# Altium PCB Kick_PCB.PcbDoc
Units mm, origin at the board's own origin, x right, y up, seen from the top; angles counter-clockwise.
Board outline 90 x 34 mm, 2 copper layers (Top Layer, Bottom Layer); 55 components, 43 nets, 172 pads, 27 vias.
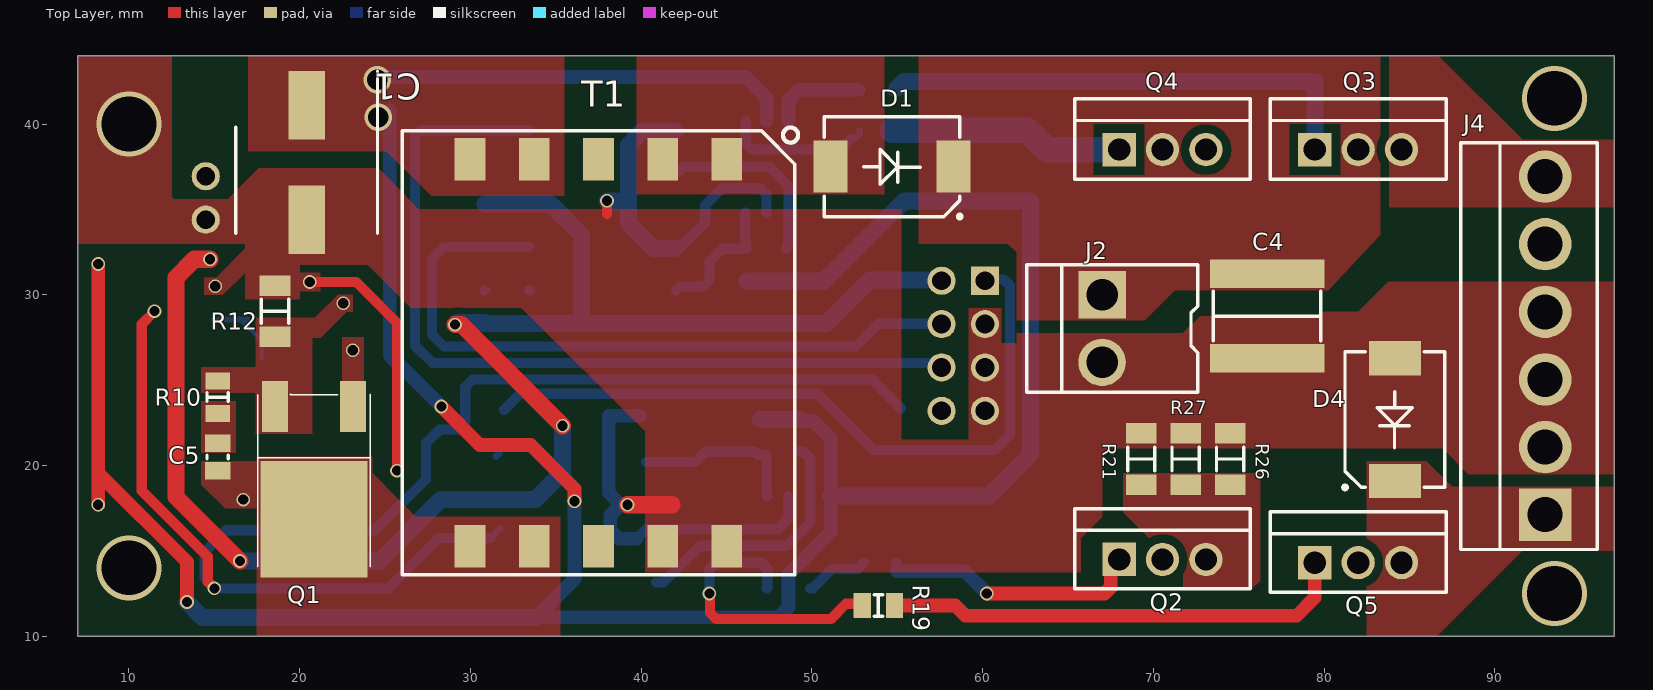
[diagram p0: Top Layer view]
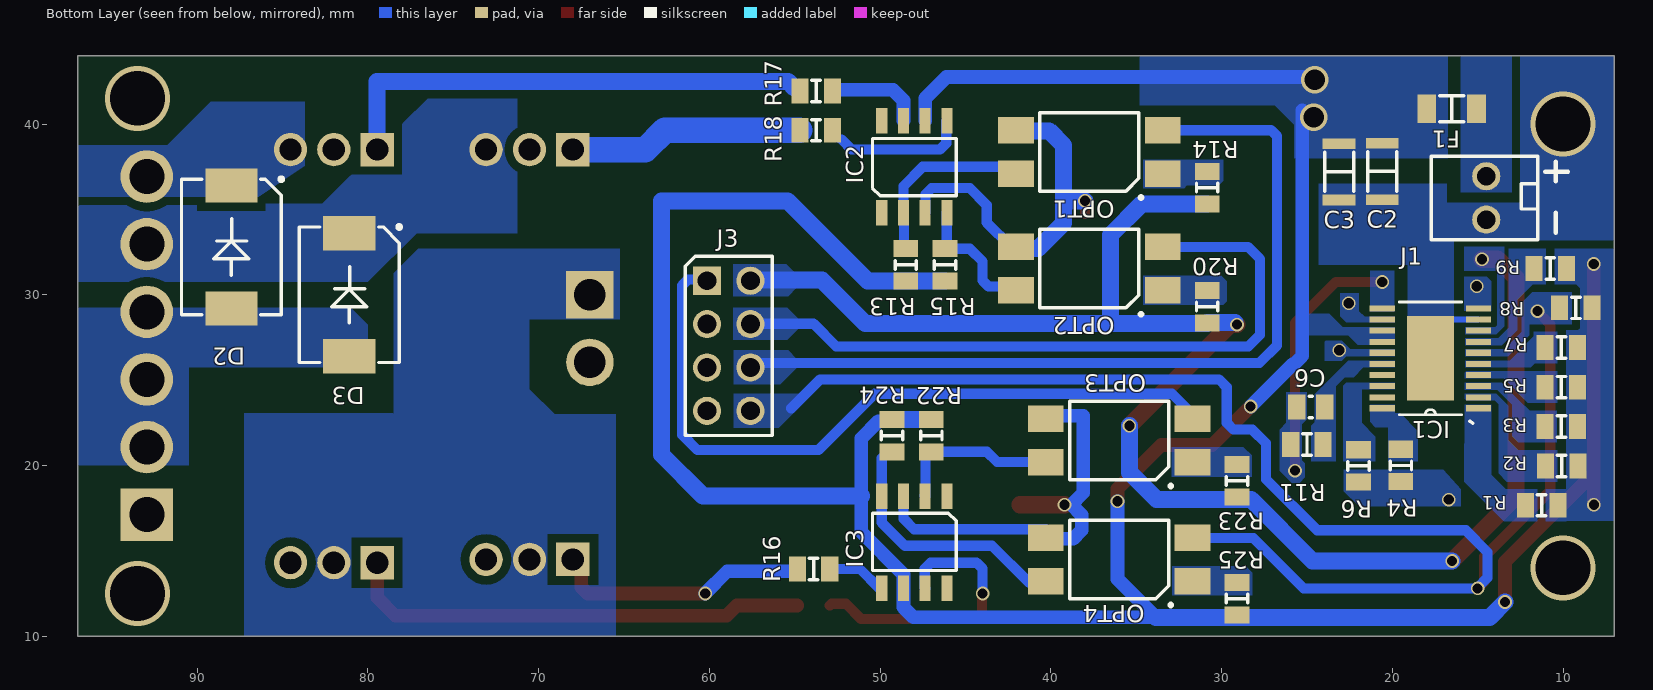
[diagram p1: Bottom Layer view, seen from below]
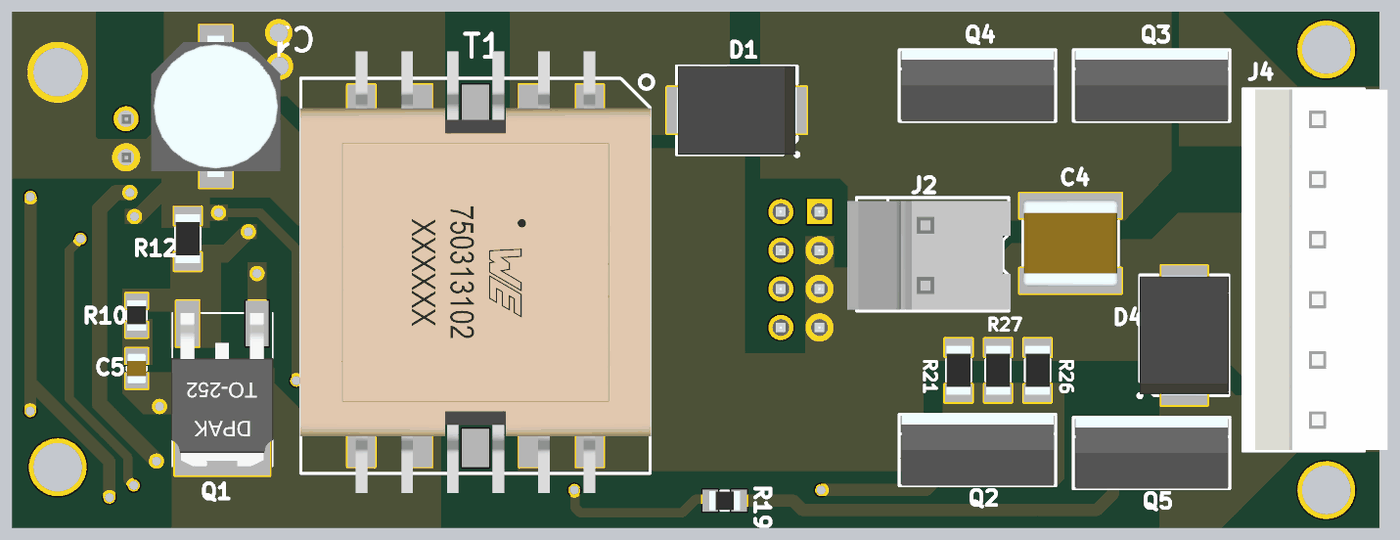
[diagram p2: 3D render of the assembled board from above, using the file's embedded part models]
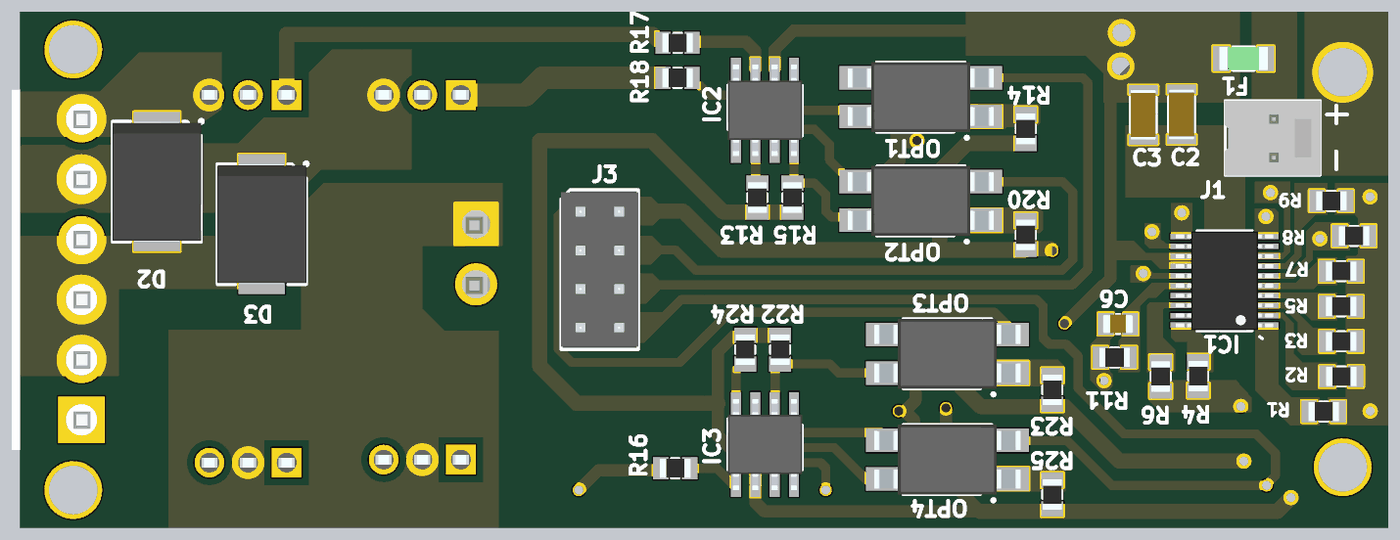
[diagram p3: 3D render of the assembled board from below, using the file's embedded part models]

## Layer stack, top to bottom
Top Solder: solder mask 0.0102, Solder Resist, Dk 3.5
Top Layer: signal copper 0.0356
Dielectric 1: dielectric 0.32, FR-4, Dk 4.8
Bottom Layer: signal copper 0.0356
Bottom Solder: solder mask 0.0102, Solder Resist, Dk 3.5

## Board outline
7,10 7,44 97,44 97,10

## Design rules (kind name [scope] priority, off if disabled: settings)
Clearance Clearance_11 [InNamedPolygon('Bottom Layer-NetD3_1')] p1: gap=0.5 ignorepadtopadclearanceinfootprint=FALSE
Clearance Clearance_10 [InNamedPolygon('Bottom Layer-NetD2_1')] p2: gap=0.5 ignorepadtopadclearanceinfootprint=FALSE
Clearance Clearance_9 [InNamedPolygon('Top Layer-NetD4_1')] p3: gap=0.5 ignorepadtopadclearanceinfootprint=FALSE
Clearance Clearance_8 [InNamedPolygon('Top Layer-GND')] p4: gap=0.5 ignorepadtopadclearanceinfootprint=FALSE
Clearance Clearance_7 [InNamedPolygon('Top Layer-NetQ2_3')] p5: gap=0.5 ignorepadtopadclearanceinfootprint=FALSE
Clearance Clearance_6 [InNamedPolygon('Top Layer-NetQ2_3')] p6: gap=0.5 ignorepadtopadclearanceinfootprint=FALSE
Clearance Clearance_5 [InNamedPolygon('Top Layer-NetD2_1')] p7: gap=0.5 ignorepadtopadclearanceinfootprint=FALSE
Clearance Clearance_4 [InNamedPolygon('Bottom Layer-Vcap')] p8: gap=0.5 ignorepadtopadclearanceinfootprint=FALSE
Clearance Clearance_2 [InNamedPolygon('Top Layer-GND')] p9: gap=0.5 ignorepadtopadclearanceinfootprint=FALSE
Clearance Clearance_3 [InNamedPolygon('Bottom Layer-NetD2_1')] p10: gap=0.5 ignorepadtopadclearanceinfootprint=FALSE
Clearance Clearance_1 [InNamedPolygon('Top Layer-Vcap')] p11: gap=0.5 ignorepadtopadclearanceinfootprint=FALSE
Clearance [All] p12: gap=0.2 ignorepadtopadclearanceinfootprint=FALSE
ComponentClearance [All] p1 off: gap=0.2 collisioncheckmode=3 verticalgap=0.2 showdistances=FALSE
DiffPairsRouting [All] p1: maxlimit=10 minlimit=0.254 mostfreqgap=0.254 toplayer_minwidth=0.381 toplayer_maxwidth=10 toplayer_prefwidth=0.381 bottomlayer_minwidth=0.381 bottomlayer_maxwidth=10 bottomlayer_prefwidth=0.381 maxuncoupledlength=12.7
Height [All] p1 off: minheight=0 maxheight=100 prefheight=12.7
PlaneConnect [All] p1: planeconnectstyle=Direct reliefexpansion=0.508 reliefentries=4 reliefconductorwidth=0.254 reliefairgap=0.254
PolygonConnect [All] p1: connectstyle=Direct reliefconductorwidth=0.254 reliefentries=4 polygonreliefangle="90 Angle" airgapwidth=0.254
RoutingVias [All] p1: holewidth=0.711 width=1.27 viastyle="Through Hole" minholewidth=0.5 minwidth=0.5 maxholewidth=10 maxwidth=10
SolderMaskExpansion [All] p1: expansion=0.102
Width [All] p1: maxlimit=10 minlimit=0.254 preferedwidth=0.254
26 further rules are at their usual default settings.

## Components (designator, comment, footprint, x,y, rotation, side; value= is the part's Value field where it differs from the comment)
C1 "100uF" CAPAE830X1050N 20.407,37.75 r270 top
C2 "10 uF" CAPCER1206 20.592,37.223 r90 bottom
C3 "10 uF" CAPCER1206 23.116,37.2 r90 bottom
C4 "200V" "CAP OUT 2225" 76.664,28.75 r90 top
C5 "CAP 0805 50V" "CAP0805 50V" 15.199,20.5 r270 top
C6 "CAP 0805 50V" "CAP0805 50V" 24.779,23.429 r180 bottom
D1 "MBRS3201T3G" "DIODE MBRS3201T" 54.693,37.5 r180 top
D2 "MBRS3201T3G" "DIODE MBRS3201T" 88,32.8 r270 bottom
D3 "MBRS3201T3G" "DIODE MBRS3201T" 81.096,30 r270 bottom
D4 "MBRS3201T3G" "DIODE MBRS3201T" 84.15,22.684 r90 top
F1 "Fuse 3A ou 5A" "FUSE 3A 63V" 16.524,40.9 r0 bottom
IC1 "LT3751 Charger Controler" "LT3751 CHARGER CONTROLER" 17.769,26.272 r0 bottom locked
IC2 "TC4426EOA" SOIC127_TC4426 48,37.5 r90 bottom
IC3 "TC4426EOA" SOIC127_TC4426 48,15.5 r270 bottom
J1 "CONN HEADER 2POS" "BATTERY RETO CONNECTOR" 17.55,35.67 r90 bottom
J2 "CONN CAP" "CONN CAP" 67,30 r90 top
J3 "CONN MAIN 2.54mm" "CONN MAIN 2.54MM" 60.14,30.82 r270 bottom locked
J4 "CONN SOLENOID" "CONN SOLENOID" 92.955,17.12 r90 top
OPT1 "PC817X1NIP1B" SOP254_OPTO_PC817 37.75,38.364 r0 bottom
OPT2 "PC817X1NIP1B" SOP254_OPTO_PC817 37.75,31.53 r0 bottom
OPT3 "PC817X1NIP1B" SOP254_OPTO_PC817 36,21.471 r0 bottom
OPT4 "PC817X1NIP1B" SOP254_OPTO_PC817 36,14.5 r0 bottom
Q1 "Mosfet N 50V 50A" "MOSFET CHAVEAMENTO" 20.839,15.052 r180 top
Q2 "Mosfet N Disparo" "MOSFET DISPARO 2" 68,14.5 r0 top
Q3 "Mosfet N Disparo" "MOSFET DISPARO 2" 79.46,38.5 r0 top
Q4 "Mosfet N Disparo" "MOSFET DISPARO 2" 68,38.5 r0 top
Q5 "Mosfet N Disparo" "MOSFET DISPARO 2" 79.46,14.304 r0 top
R1 "40K" "RES 0805" 11.25,17.668 r0 bottom
R2 "200K" "RES 0805" 10.083,19.973 r0 bottom
R3 "375K" "RES 0805" 10.098,22.284 r0 bottom
R4 "18K2" "RES 0805" 19.5,20 r270 bottom
R5 "195K" "RES 0805" 10.098,24.588 r0 bottom
R6 "16K5" "RES 0805" 21.975,19.973 r270 bottom
R7 "375K" "RES 0805" 10.098,26.907 r0 bottom
R8 "100K" "RES 0805" 9.25,29.234 r0 bottom
R9 "100K" "RES 0805" 10.75,31.538 r0 bottom
R10 "" "RES 0805" 15.199,24 r270 top
R11 "18K2" "RES 0805" 25,21.234 r0 bottom
R12 "RES 1206" "RES 1206" 18.553,29.041 r90 top
R13 "1K" "RES 0805" 48.5,31.75 r270 bottom
R14 "360R" "RES 0805" 30.846,36.273 r90 bottom
R15 "1K" "RES 0805" 46.196,31.75 r270 bottom
R16 "1K" "RES 0805" 53.9,13.939 r0 bottom
R17 "1K" "RES 0805" 53.75,41.938 r0 bottom
R18 "1K" "RES 0805" 53.75,39.634 r0 bottom
R19 "1K" "RES 0805" 53.9,11.8 r0 top
R20 "360R" "RES 0805" 30.846,29.3 r90 bottom
R21 "RES 1206" "RES 1206" 69.291,20.379 r270 top
R22 "1K" "RES 0805" 47,21.75 r90 bottom
R23 "360R" "RES 0805" 29.096,19.1 r90 bottom
R24 "1K" "RES 0805" 49.304,21.75 r90 bottom
R25 "360R" "RES 0805" 29.096,12.2 r90 bottom
R26 "RES 1206" "RES 1206" 74.5,20.379 r270 top
R27 "RES 1206" "RES 1206" 71.896,20.379 r270 top
T1 "Trafo 750032051" "TRAFO FLYBACK" 37.5,26.602 r270 top locked

## Footprints (in the part's own frame and the unit in brackets; to place one, negate y for a bottom-side part, rotate by r counter-clockwise, add the part's x,y. Pads: shape width x height; smd on the part's side, far side on the other; paste and mask are expansions set on the pad)
"BATTERY RETO CONNECTOR" [mm] "22-05-3021"
  round 1.65 hole 1.07: 1(1.27,-3.05) 2(-1.27,-3.05)
  silkscreen extent -2.44,-7.84 2.45,0.18, body extent -2.48,-6.13 2.44,0.22, height 10.68
"CAP0805 50V" [mm] "CAPC2012X94N"
  rect 1.02x1.47 smd: 1(-0.81,0) 2(0.81,0)
  silkscreen extent -0.1,-0.63 0.1,0.63, body extent -1,-0.63 1,0.63, height 0.94
"CAP OUT 2225" [mm] "CAP CER 200V 2225"
  rect 1.66x6.71 smd: 1(-2.47,0) 2(2.47,0)
  silkscreen extent -1.45,-3.15 1.45,3.15, body extent -2.85,-3.15 2.85,3.15, height 3.4
CAPAE830X1050N [mm]
  rect 4x2.15 smd: 1(-3.35,0) 2(3.35,0)
  silkscreen extent -5.35,-4.15 4.15,4.15, body extent -4.65,-4.25 4.65,4.25, height 10.5
CAPCER1206 [mm] "CAPC3317X75N"
  rect 0.62x1.92 smd: 1(-1.65,0) 2(1.65,0)
  silkscreen extent -1.15,-0.85 1.15,0.85, body extent -1.65,-0.85 1.65,0.85, height 0.75
"CONN CAP" [mm] "CONN HEADER VERT 2POS 3.96MM"
  rect 2.775x2.775 hole 1.85: 1(0,0)
  round 2.775 hole 1.85: 2(-3.96,0)
  silkscreen extent -5.71,-5.6 1.75,4.42, body extent -5.64,-5.71 1.52,5.04, height 13.85
"CONN MAIN 2.54MM" [mm] "CONN HEADER VERT 8POS 2.54MM"
  rect 1.65x1.65 hole 1.1: 1(0,0)
  round 1.65 hole 1.1: 2(0,2.54) 3(2.54,0) 4(2.54,2.54) 5(5.08,0) 6(5.08,2.54) 7(7.62,0) 8(7.62,2.54)
  silkscreen extent -1.45,-1.27 9.07,3.81, body extent -1.27,-1.27 8.89,3.81, height 8.68
"CONN SOLENOID" [mm] "SHDR6W183P0X396_1X6_2377X762X1105P"
  rect 3.075x3.075 hole 2.05: 1(0,0)
  round 3.075 hole 2.05: 2(3.96,0) 3(7.92,0) 4(11.88,0) 5(15.84,0) 6(19.8,0)
  silkscreen extent -2.04,-3.05 21.78,4.95, body extent -2,-4.6 21.76,5, height 13.9
"DIODE MBRS3201T" [mm] "Diode"
  rect 2x3.05 smd: 1(-3.6,0) 2(3.6,0)
  silkscreen extent -4.07,-2.92 3.97,3.02, body extent -3.97,-2.92 3.97,2.92, height 2.56
"FUSE 3A 63V" [mm] "FUSC3215X66N"
  rect 1.1x1.67 smd: 1(-1.46,0) 2(1.46,0)
  silkscreen extent -0.7,-0.76 0.71,0.76, body extent -1.59,-0.76 1.59,0.76, height 0.66
"LT3751 CHARGER CONTROLER" [mil]
  rect 58x14 smd: 1(-111,115) 2(-111,90) 3(-111,64) 4(-111,38) 5(-111,13) 6(-111,-13) 7(-111,-38) 8(-111,-64) 9(-111,-90) 10(-111,-115) 11(111,-115) 12(111,-90) 13(111,-64) 14(111,-38) 15(111,-13) 16(111,13) 17(111,38) 18(111,64) 19(111,90) 20(111,115)
  rect 108x195 smd: 21(0,0)
  silkscreen extent -97,-130 72,150, body extent -126,-128 126,128, height 47
"MOSFET CHAVEAMENTO" [mm] "Mosfet-N 50V 50A"
  rect 1.5x3 smd: 1(-2.286,-8.4) 3(2.286,-8.4)
  rect 6.25x6.8 smd: 2(0,-1.8)
  silkscreen extent -3.3,-9.11 3.3,0.99, body extent -3.35,-9.11 3.38,0.99, height 2.37
"MOSFET DISPARO 2" [mm] "Mosfet N Disparo"
  rect 1.95x1.95 hole 1.3: 1(0,0)
  round 1.95 hole 1.3: 2(2.54,0) 3(5.08,0)
  silkscreen extent -2.61,-1.73 7.69,2.98, body extent -2.46,-1.72 7.54,2.98, height 34
"RES 0805" [mm] "RESC2012X65N"
  rect 1x1.45 smd: 1(-0.95,0) 2(0.95,0)
  silkscreen extent -0.25,-0.63 0.25,0.63, body extent -1,-0.63 1,0.63, height 0.65
"RES 1206" [mm] "RESC3216X75N"
  rect 1.2x1.8 smd: 1(-1.5,0) 2(1.5,0)
  silkscreen extent -0.7,-0.8 0.7,0.8, body extent -1.6,-0.8 1.6,0.8, height 0.75
SOIC127_TC4426 [mm] "TC4426"
  rect 1.5x0.65 smd: 1(-2.7,1.905) 2(-2.7,0.635) 3(-2.7,-0.635) 4(-2.7,-1.905) 5(2.7,-1.905) 6(2.7,-0.635) 7(2.7,0.635) 8(2.7,1.905)
  silkscreen extent -1.7,-2.45 1.65,2.45, body extent -3,-2.45 3,2.45, height 1.75
SOP254_OPTO_PC817 [mm] "PC817X1NIP1B"
  rect 2.1x1.55 smd: 1(-4.3,1.27) 2(-4.3,-1.27) 3(4.3,-1.27) 4(4.3,1.27)
  silkscreen extent -3.03,-2.3 2.9,2.68, body extent -4.8,-2.3 4.8,2.3, height 4.2
"TRAFO FLYBACK" [mm] "750032051"
  rect 2.5x1.8 smd: 1(-11.33,7.52) 2(-11.33,3.76) 3(-11.33,0) 4(-11.33,-3.76) 5(-11.33,-7.52) 6(11.33,-7.52) 7(11.33,-3.76) 8(11.33,0) 9(11.33,3.76) 10(11.33,7.52)
  silkscreen extent -13.19,-11.5 13,11.69, body extent -14.77,-11.56 14.31,11.56, height 11.48

## Part data
C1: library part "CAP ALUM 100UF 20% 50V SMD", "100µF 50V Aluminum Electrolytic Capacitors Radial, Can - SMD 5000 Hrs @ 105°C /  / UCD1H101MNL1GS /  / 493-6388-6-ND", Manufacturer_Name=Nichicon, Manufacturer_Part_Number=UCD1H101MNL1GS, Mouser Part Number=647-UCD1H101MNL1GS, RS Part Number=7151372P, Allied_Number=70409359, Allied Price/Stock=https://www.alliedelec.com/nichicon-ucd1h101mnl1gs/70409359/, Datasheet Link=http://www.nichicon.co.jp/english/products/pdfs/e-ucd.pdf, Height=10.5mm, Mouser Price/Stock=https://www.mouser.com/Search/Refine.aspx?Keyword=647-UCD1H101MNL1GS, RS Price/Stock=http://uk.rs-online.com/web/p/products/7151372P
C2 C3: library part "CAP CER 1206", "Capacitor C3216C0G1H103J060AA", Manufacturer_Name=TDK, Manufacturer_Part_Number=C3216C0G1H103J060AA, Mouser Part Number=810-C3216C0G1H103J-1, RS Part Number=7407467P, Datasheet Link=https://product.tdk.com/info/en/catalog/datasheets/mlcc_commercial_midvoltage_en.pdf, Height=0.75mm, Mouser Price/Stock=https://www.mouser.com/Search/Refine.aspx?Keyword=810-C3216C0G1H103J-1, RS Price/Stock=http://uk.rs-online.com/web/p/products/7407467P
C4: library part "CAP OUT 2225", "Capacitor / CAP CER 1UF 200V X7R 2225 / 720-1136-1-ND / VJ2225Y105KXCAT", Manufacturer_Name=AVX, Manufacturer_Part_Number=2225HC103KAZ1A, Mouser Part Number=581-2225HC103KAZ1A, Datasheet Link=http://datasheets.avx.com/HV-FlexitermMLCC.pdf, Height=3.4mm, Mouser Price/Stock=https://www.mouser.com/Search/Refine.aspx?Keyword=581-2225HC103KAZ1A
C5 C6: "Capacitor / 08055A101JAT2A", Manufacturer_Name=AVX, Manufacturer_Part_Number=08055A101JAT2A, Mouser Part Number=581-08055A101J, RS Part Number=1243222, Allied_Number=70474488, Allied Price/Stock=https://www.alliedelec.com/avx-08055a101jat2a/70474488/, Datasheet Link=https://componentsearchengine.com/Datasheets/1/06031A100FAT2A.pdf, Height=0.94mm, Mouser Price/Stock=https://www.mouser.com/Search/Refine.aspx?Keyword=581-08055A101J, RS Price/Stock=https://uk.rs-online.com/web/p/products/1243222
D1 D2 D3 D4: library part "DIODE MBRS3201T3G", "Diode / MBRS3201T3G", Manufacturer_Name="ON Semiconductor", Mouser Part Number=863-MBRS3201T3G, RS Part Number=7925640P, Allied_Number=70339717, Allied Price/Stock=http://www.alliedelec.com/on-semiconductor-mbrs3201t3g/70339717/, Datasheet Link=http://www.onsemi.com/pub/Collateral/MBRS3201T3-D.PDF, Height=2.56mm, Manufacturer_Part_Number=MBRS3201T3G, Mouser Price/Stock=https://www.mouser.com/Search/Refine.aspx?Keyword=863-MBRS3201T3G, RS Price/Stock=http://uk.rs-online.com/web/p/products/7925640P
F1: library part "Fuse 3A 63V", "Fuse / FUSE 3.0A 63VAC/DC SLOW 1206 / 507-1896-1-ND /  / 0685T3000-01 /  / Ou o de 5A abaixo 0685T5000-01", Manufacturer_Name=LITTELFUSE, Manufacturer_Part_Number=0466001.NRHF, Mouser Part Number=576-0466001.NRHF, Datasheet Link=http://www.mouser.com/datasheet/2/240/Littelfuse_Fuse_466_Datasheet.pdf-1317335.pdf, Height=0.66mm, Mouser Price/Stock=https://www.mouser.com/Search/Refine.aspx?Keyword=576-0466001.NRHF
IC1: "Integrated Circuit", Manufacturer_Name="Linear Technology", Manufacturer_Part_Number=LT3751EFEPBF
IC2 IC3: "Integrated Circuit", Manufacturer_Name=Microchip, Mouser Part Number=579-TC4426EOA, RS Part Number=6684345, Allied_Number=70046935, Allied Price/Stock=https://www.alliedelec.com/microchiptechnologyinc-tc4426eoa/70046935/, Datasheet Link=http://ww1.microchip.com/downloads/en/DeviceDoc/20001422G.pdf, Height=1.75mm, Manufacturer_Part_Number=TC4426EOA, Mouser Price/Stock=https://www.mouser.com/Search/Refine.aspx?Keyword=579-TC4426EOA, RS Price/Stock=https://uk.rs-online.com/web/p/products/6684345
J1: library part "Battery Connector", "CONN HEADER R/A 2POS 2.54MM / 22-05-3021 / WM4300-ND", Manufacturer_Name=Molex, Manufacturer_Part_Number=22-05-3021, Mouser Part Number=538-22-05-3021, RS Part Number=6795448, Allied_Number=70190620, Allied Price/Stock=https://www.alliedelec.com/molex-incorporated-22-05-3021/70190620/, Datasheet Link=http://www.molex.com/webdocs/datasheets/pdf/en-us/0022053031_PCB_HEADERS.pdf, Mouser Price/Stock=https://www.mouser.com/Search/Refine.aspx?Keyword=538-22-05-3021, RS Price/Stock=https://uk.rs-online.com/web/p/products/6795448
J2: "Connector / CONN HEADER VERT 2POS 3.96MM / 0009652028 / WM18823-ND", Capacitancia=4000uF, Manufacturer_Name=Molex, Manufacturer_Part_Number=09-65-2028, Mouser Part Number=538-09-65-2028, RS Part Number=6705237P, Allied_Number=70374002, Allied Price/Stock=https://www.alliedelec.com/molex-incorporated-09-65-2028/70374002/, Datasheet Link=https://www.molex.com/webdocs/datasheets/pdf/en-us/0009652028_PCB_HEADERS.pdf, Height=14.25mm, Mouser Price/Stock=https://www.mouser.com/Search/Refine.aspx?Keyword=538-09-65-2028, RS Price/Stock=http://uk.rs-online.com/web/p/products/6705237P
J3: "Connector /  / CONN HEADER VERT 8POS 2.54MM /  / M20-9980445 /  / 952-2122-ND", Manufacturer_Name=FCI, Manufacturer_Part_Number=20021311-00010T4LF, Mouser Part Number=649-221311-00010T4LF, Datasheet Link=http://portal.fciconnect.com/Comergent//fci/drawing/20021311.pdf, Height=4.6mm, Mouser Price/Stock=https://www.mouser.com/Search/Refine.aspx?Keyword=649-221311-00010T4LF, System=Connector
J4: "Connector / CONN HEADER VERT 6POS 3.96MM / 0026604060 / WM4624-ND", Manufacturer_Name="TE Connectivity", Manufacturer_Part_Number=640445-6, Mouser Part Number=571-6404456, RS Part Number=1789596P, Allied_Number=70083693, Allied Price/Stock=https://www.alliedelec.com/te-connectivity-640445-6/70083693/, Datasheet Link=http://www.te.com/commerce/DocumentDelivery/DDEController?Action=srchrtrv&DocNm=640445&DocType=Customer+Drawing&DocLang=English, Height=11.049mm, Mouser Price/Stock=https://www.mouser.com/Search/Refine.aspx?Keyword=571-6404456, RS Price/Stock=http://uk.rs-online.com/web/p/products/1789596P
OPT1 OPT2 OPT3 OPT4: "Integrated Circuit", Manufacturer_Name="Sharp Microelectronics", Mouser Part Number=852-PC817X1NIP1B, Datasheet Link=https://cdn.sharpsde.com/fileadmin/products/Optoelectronics/Isolation%20Devices/Specs%20Photocoupler/PC817XxNIP1B_12Oct16_Spec_ED-16P011.pdf, Height=4.2mm, Manufacturer_Part_Number=PC817X1NIP1B, Mouser Price/Stock=https://www.mouser.com/Search/Refine.aspx?Keyword=852-PC817X1NIP1B
Q1: library part "Mosfet Chaveamento", "MOSFET (N-Channel) / N-Channel 50V 50A (Tc) 75W (Tc) Surface Mount TO-252AA / SQD50N05-11L_GE3 / SQD50N05-11L_GE3CT-ND", Manufacturer_Name="Alpha & Omega Semiconductors", Manufacturer_Part_Number=SQD50N05-11L_GE3, Datasheet Link=http://aosmd.com/res/data_sheets/AOD4189.pdf, Height=2mm
Q2 Q3 Q4 Q5: "MOSFET (N-Channel) / N-Channel 300V 56A (Tc) 320W (Tc) Surface Mount TO-263AA / IXFA56N30X3-ND / 300V/56A ULTRA JUNCTION X3-CLASS", Manufacturer_Name="ON Semiconductor", Manufacturer_Part_Number=IXFA56N30X3-ND, Datasheet Link=https://www.onsemi.com/pub/Collateral/BBS3002-D.PDF, Height=4.83mm, Mouser Price/Stock=https://www.mouser.com/Search/Refine.aspx?Keyword=863-BBS3002-TL-1E
R1 R2 R3 R4 R5 R6 R7 R8 R9 R10 R11 R13 R14 R15 R16 R17 R18 R19 R20 R22 R23 R24: library part "Resistor 0805", "Resistor 0805", Manufacturer_Name="TE Connectivity", Manufacturer_Part_Number=CPF0805B105RE1, Mouser Part Number=279-CPF0805B105RE1, RS Part Number=1239398, Datasheet Link=http://docs-europe.electrocomponents.com/webdocs/13d1/0900766b813d116f.pdf, Height=0.65mm, Mouser Price/Stock=https://www.mouser.com/Search/Refine.aspx?Keyword=279-CPF0805B105RE1, RS Price/Stock=http://uk.rs-online.com/web/p/products/1239398
R12 R21 R26 R27: "Resistor CR1206-FW-1504ELF", Manufacturer_Name=Bourns, Manufacturer_Part_Number=CR1206-FW-1504ELF, Mouser Part Number=652-CR1206FW1504ELF, Datasheet Link=http://componentsearchengine.com/Datasheets/1/CR1206-FW-1504ELF.pdf, Height=0.75mm, Mouser Price/Stock=https://www.mouser.com/Search/Refine.aspx?Keyword=652-CR1206FW1504ELF
R25: library part "Resistor 0805", "Resistor", Manufacturer_Name="TE Connectivity", Manufacturer_Part_Number=CPF0805B105RE1, Mouser Part Number=279-CPF0805B105RE1, RS Part Number=1239398, Datasheet Link=http://docs-europe.electrocomponents.com/webdocs/13d1/0900766b813d116f.pdf, Height=0.65mm, Mouser Price/Stock=https://www.mouser.com/Search/Refine.aspx?Keyword=279-CPF0805B105RE1, RS Price/Stock=http://uk.rs-online.com/web/p/products/1239398
T1: "Transformer", Manufacturer_Name="Wurth Elektronik", Manufacturer_Part_Number=750032051, Mouser Part Number=N/A, Mouser Price/Stock=https://www.mouser.com/Search/Refine.aspx?Keyword=N%2FA

## Via types
v1: diameter 0.8, hole 0.6, Top Layer to Bottom Layer, 21 vias
v2: diameter 3.8, hole 3.2, Top Layer to Bottom Layer, 4 vias
v3: diameter 1.6, hole 1.2, Top Layer to Bottom Layer, 2 vias

## Nets (pads, with @x,y where several pads share a name; then routed paths per layer and width w, separated by ;. In a path a pad name is that pad's centre, name@x,y a point inside that pad or via, vN(x,y) a via of type N, cw(c..) or ccw(c..) an arc to the next point about the centre after c; other vN are vias at no path point)
+V: IC1.8 J3.2 R14.1 R20.1 R23.1 | length 94.2
  Top Layer w1: v1(14.75,32.08) 13.83,32.08 12.75,31 12.75,18.15 v1(16.5,14.4) ; v1(29.096,28.25) 29.475,28.25 v1(35.4,22.325)
  Bottom Layer w0.6: R20.1@30.821,28.375 R20.1
  Bottom Layer w1: v1(16.5,14.4) 24.67,14.4 28.27,18 33.8,18 35.4,19.6 v1(35.4,22.325) ; v1@29.221,28.375 R20.1@30.821,28.375 ; R20.1@30.846,28.304 36.5,28.304 ; R14.1 34.677,35.323 36.5,33.5 36.5,28.304 ; J3.2 57.566,30.854 53.4,30.854 50.85,28.304 36.5,28.304
Chip_Kick: J3.1 OPT3.2 | length 42.1
  Bottom Layer w0.6: OPT3.2@31.975,23.27 32.905,24.2 50.322,24.2 53.622,20.9 60.7,20.9 61.6,21.8 61.6,30.549 61.249,30.9 60.22,30.9 J3.1
Discharge: IC3.5 R16.1 | length 3.8
  Bottom Layer w0.6: IC3.5 50.05,12.8 51.183,13.933 52.679,13.933 R16.1@53.05,14.304
F\A\U\L\T\: IC1.6 J3.8 OPT4.2 R8.2 | length 86.9
  Top Layer w0.6: v1@11.5,29.02 10.75,28.27 10.75,18.517 14.612,14.655 14.612,13.194 v1(15.006,12.8)
  Bottom Layer w0.4: OPT4.2@31.18,15.75 OPT4.2@31.7,16.27
  Bottom Layer w0.6: OPT4.2@31.18,15.75 28.15,15.75 25.2,12.8 v1(15.006,12.8) 15.006,12.854 14.43,13.431 14.43,14.93 15.7,16.2 24.4,16.2 27.4,19.2 27.4,21.3 28.2,22.1 29.3,22.1 29.7,22.5 29.7,24.588 30.152,25.04 53.511,25.04 55.2,23.351
  other v1: 11.5,29.041
GND: C1.2 C2.1 C3.1 C4.1 C6.1 D2.2 D3.2 D4.2 IC1.9 IC1.10 IC1.11 IC1.21 IC2.3 IC3.3 J1.2 J2.2 J3.3 J3.5 J3.7 J4.2 J4.3 J4.4 OPT1.3 OPT2.3 OPT3.3 OPT4.3 R11.2 R12.2 R21.1 R26.1 R27.1 T1.9 T1.10 | length 65.5
  Top Layer w0.6: v1(20.588,30.75) 23.3,30.75 25.7,28.35 v1(25.7,19.7) ; 38,34.75 v1(38,35.5)
  Top Layer w1: v1(39.2,17.7) 41.8,17.7
  Bottom Layer w0.254: IC1.21@16.524,28.558 17.769,27.313 IC1.21
  Bottom Layer w0.35: IC1.9 16.524,28.558 IC1.21@16.949,28.558
  Bottom Layer w0.381: IC3.3@48.628,18.193 IC3.3
  Bottom Layer w0.6: OPT4.3@39.73,15.7 40.3,16.27 48.02,16.27 48.628,16.878 IC3.3@48.628,18.193 ; OPT2.3@41.95,32.7 OPT2.3 42.325,32.8 43.75,34.225 43.75,35.25 44.75,36.25 46.989,36.25 47.34,35.899 47.34,34.825 IC2.3 ; OPT1.3@42.016,39.6 OPT1.3
  Bottom Layer w0.8: OPT4.3@39.73,15.7 38.7,15.7 38.2,16.2 38.2,17.1 38.8,17.7 38.1,18.4 38.1,22.919 OPT3.3@39.949,22.919
  Bottom Layer w1: v1(38,35.5) 39.249,35.5 ; OPT2.3@41.95,32.7 40.75,32.7 39.249,34.201 39.249,35.5 ; OPT1.3@42.016,39.6 40.1,39.6 39.249,38.749 39.249,35.5
  other v1: 15.05,30.5
  other v2: 10,40
L_Kick: J3.6 OPT1.2 | length 50.5
  Bottom Layer w0.6: OPT1.2 27.101,39.634 26.75,39.282 26.75,27.041 27.791,26 57.34,26 J3.6
NetC5_1: C5.1 R10.2
NetC5_2: C5.2 Q1.2 R4.2 R6.2 T1.6 T1.7
  other v1: 16.7,18
NetC6_2: C6.2 IC1.16 R11.1
NetD1_2: D1.2 T1.1 T1.2
NetD2_1: D2.1 J4.6 Q3.3
NetD3_1: D3.1 J4.5 Q4.3
NetD4_1: D4.1 J4.1 Q5.3
NetF1_1: F1.1 J1.1
NetIC1_1: IC1.1 R1.2
NetIC1_2: IC1.2 R2.2
NetIC1_3: IC1.3 R3.2
NetIC1_4: IC1.4 R5.2
NetIC1_5: IC1.5 R7.2
NetIC1_7: IC1.7 R9.2
NetIC1_12: IC1.12 Q1.3 R10.1 R12.1
  other v1: 22.55,29.5
NetIC1_15: IC1.15 Q1.1
  other v1: 23.116,26.75
NetIC1_18: IC1.18 R6.1
NetIC1_20: IC1.20 R4.1
NetIC2_2: IC2.2 OPT1.4 R13.1 | length 10.9
  Bottom Layer w0.6: OPT1.4 42.456,37.5 47.5,37.5 48.635,36.365 IC2.2 48.61,34.775 48.61,32.81 R13.1
NetIC2_4: IC2.4 OPT2.4 R15.1 | length 8
  Bottom Layer w0.381: R15.1@46.095,32.801 R15.1
  Bottom Layer w0.6: OPT2.4 42.269,30.478 43.649,30.478 44,30.83 44,31.95 44.75,32.7 R15.1 ; R15.1@46.095,32.801 IC2.4
NetIC3_2: IC3.2 OPT3.4 R22.1 | length 9.8
  Bottom Layer w0.6: OPT3.4 43.151,20.201 43.75,20.8 46.66,20.8 46.83,20.63 47.31,20.63 47.34,20.6 47.34,18.225 IC3.2 IC3.2@47.39,18.225
NetIC3_4: IC3.4 OPT4.4 R24.1 | length 15
  Bottom Layer w0.6: OPT4.4@40.88,13.15 41.3,13.15 43.45,15.3 48.55,15.3 49.905,16.655 IC3.4 49.905,20.424 49.529,20.8 R24.1
NetOPT1_1: OPT1.1 R14.2
NetOPT2_1: OPT2.1 R20.2 | length 0
  Bottom Layer w0.6: R20.2 R20.2@30.851,30.255 ; OPT2.1@33.445,30.255 OPT2.1
NetOPT3_1: OPT3.1 R23.2 | length 0.3
  Bottom Layer w0.381: OPT3.1@31.471,20.501 OPT3.1@31.7,20.73
NetOPT4_1: OPT4.1 R25.2
NetQ2_1: Q2.1 R16.2 | length 15.6
  Top Layer w0.6: Q2.1@67.5,14 Q2.1
  Top Layer w0.8: v1(60.25,12.5) 67.149,12.5 67.5,12.851 Q2.1@67.5,14
  Bottom Layer w0.6: R16.2@54.95,14.304 54.95,13.839 R16.2@54.989,13.8
  Bottom Layer w0.8: R16.2@54.989,13.8 58.95,13.8 v1(60.25,12.5)
NetQ2_3: Q2.3 R21.2 R26.2 R27.2
NetQ3_1: Q3.1 R17.2 | length 29
  Bottom Layer w0.6: R17.2 54.862,42.1 R17.2@55,42.1
  Bottom Layer w1: R17.2@55,42.1 55.4,42.5 79.46,42.5 Q3.1
NetQ4_1: Q4.1 R18.2 | length 13.8
  Bottom Layer w1.5: R18.2 62.616,39.634 63.75,38.5 Q4.1
NetQ5_1: Q5.1 R19.2 | length 27.3
  Top Layer w0.8: R19.2 58.4,11.8 59,11.2 78.4,11.2 79.46,12.26 Q5.1
R_Kick: J3.4 OPT2.2 | length 41.1
  Bottom Layer w0.6: OPT2.2 33.449,32.801 28.451,32.801 27.75,32.1 27.75,27.657 28.437,26.97 52.57,26.97 53.9,28.3 57.58,28.3 J3.4
Sig_C: IC3.7 R19.1 | length 16.9
  Top Layer w0.6: v1(44,12.5) 44.038,12.462 44.038,11.362 44.4,11 51.1,11 52,11.9 52.85,11.9 R19.1
  Bottom Layer w0.6: v1(44,12.5) 44,13.949 44.351,14.3 47.039,14.3 47.39,13.949 47.39,12.825 IC3.7
Sig_L: IC2.7 R17.1 | length 5.6
  Bottom Layer w0.381: R17.1@52.738,42 R17.1
  Bottom Layer w0.8: IC2.7 48.635,41.385 49.25,42 R17.1@52.738,42
Sig_R: IC2.5 R18.1 | length 8.8
  Bottom Layer w0.381: IC2.5 IC2.5@46.122,40.173 ; 52.265,39.099 52.49,39.099 52.8,39.409 R18.1
  Bottom Layer w0.6: IC2.5@46.122,40.173 46.122,38.878 46.5,38.5 51.666,38.5 52.265,39.099
Vcap: C4.2 D1.1 J2.1 Q2.2 Q3.2 Q4.2 Q5.2
Vcc: C1.1 C2.2 C3.2 F1.2 IC1.13 IC1.14 IC2.6 IC3.6 R1.1 R2.1 R3.1 R5.1 R7.1 R8.1 R9.1 R13.2 R15.2 R22.2 R24.2 R25.1 T1.4 T1.5 | length 182.3
  Top Layer w0.8: v1(8.195,17.7) 8.195,19.565 ; v1(8.2,31.8) 8.2,19.565 8.195,19.565 ; v1(13.4,12) 13.4,14.36 8.195,19.565 ; v1(28.3,23.452) 30.552,21.2 33.533,21.2 36.1,18.633 v1(36.1,17.9)
  Bottom Layer w0.8: v3@25.125,42.75 46.115,42.75 47.365,41.5 IC2.6 ; v3@25.275,40.8 25.275,26.417 25.75,25.942 25.811,25.942 v1(28.3,23.452) ; v1(36.1,17.9) 36.1,13.35 33.85,11.1 48.049,11.1 48.635,11.686 IC3.6 48.628,12.806 48.628,13.618 51.1,16.089 51.1,18.2 51.1,21.6 50.1,22.6 49.404,22.6 R24.2
  Bottom Layer w1: v1(13.4,12) 14.3,11.1 33.85,11.1 ; R15.2 R13.2 50.728,30.8 55.428,35.5 62.814,35.5 62.814,20.649 60.366,18.2 51.1,18.2 ; R22.2 R24.2
  other v3: 24.6,40.4 24.55,42.6
pads on no net: IC1.17 IC1.19 IC2.1 IC2.8 IC3.1 IC3.8 T1.3 T1.8
copper on no net:
  other v2: 93.5,12.5 10,14 93.5,41.5

## Polygon pours and split planes (outlines as drawn)
Vcc on Bottom Layer (solid, pour order 258): 34.8,44 34.8,41.1 26.9,41.1 25.575,39.775 25.3,40.05 25.3,44
NetF1_1 on Bottom Layer "Top Layer-NetF1_1" (solid, pour order 62): 16,36 16,44 13,44 13,36
NetD3_1 on Bottom Layer "Bottom Layer-NetD3_1" (solid, pour order 218): 76.5,41.5 82.677,35.323 97,35.323 97,30.75 80,30.75 77.15,33.6 71.25,33.6 71.25,41.5
Vcap on Bottom Layer "Bottom Layer-Vcap" (solid, pour order 200): 65.25,28.558 70.54,28.558 70.54,24.469 69.071,23 65.5,23 65.5,10 87.25,10 87.25,23.05 78.55,23.05 78.5,23 78.5,31.25 77.05,32.7 65.25,32.7
F\A\U\L\T\ on Bottom Layer "Bottom Layer-L_Kick" (solid, pour order 256): 58.572,24.2 54.7,24.2 54.7,23.428 55.928,22.2 58.572,22.2
GND on Bottom Layer "Bottom Layer-GND 4" (solid, pour order 254): 25,24.3 26.2,24.3 26.2,22.495 26.6,22.095 26.6,19.7 25.9,19 25.425,19 25.125,19.3 25.125,20.125 25.3,20.3 25.3,22.4 25,22.7
L_Kick on Bottom Layer "Bottom Layer-L_Kick" (solid, pour order 250): 58.572,26.75 55.393,26.75 54.9,26.257 54.9,25.693 55.843,24.75 58.572,24.75
R_Kick on Bottom Layer "Bottom Layer-Chip_Kick" (solid, pour order 248): 58.6,29.25 58.6,27.35 55.45,27.35 54.7,28.1 54.7,28.5 55.45,29.25
+V on Bottom Layer "Bottom Layer-+V 1" (solid, pour order 246): 58.6,31.8 58.6,29.907 55.393,29.907 54.9,30.4 54.9,31.211 55.489,31.8
NetOPT4_1 on Bottom Layer "Bottom Layer-NetOPT4_1" (solid, pour order 242): 32.9,14.1 32.9,12.4 28.219,12.4 28.219,13.719 28.6,14.1
NetOPT3_1 on Bottom Layer "Bottom Layer-NetOPT3_1" (solid, pour order 240): 32.924,19.331 28.243,19.331 28.243,20.605 28.718,21.08 32.924,21.08
NetOPT1_1 on Bottom Layer "Bottom Layer-NetOPT1_1" (solid, pour order 236): 34.6,36.25 34.6,37.9 29.9,37.9 29.9,36.67 30.17,36.4 32.05,36.4 32.2,36.25
NetOPT2_1 on Bottom Layer "Bottom Layer-NetOPT2_1" (solid, pour order 234): 34.6,29.412 34.6,31.1 30.007,31.1 29.7,30.793 29.7,29.612 29.9,29.412
Vcc on Bottom Layer "Bottom Layer-Vcc 4" (solid, pour order 226): 11,18.6 11,16.747 9.803,16.747 9.5,17.05 9.5,18.301 9.799,18.6
GND on Bottom Layer "Bottom Layer-GND 7" (solid, pour order 222): 97,29.25 97,20 90.5,20 90.5,25.74 80,25.74 80,28.25 81,29.25
NetD2_1 on Bottom Layer "Bottom Layer-NetD2_1" (solid, pour order 216): 97,35.75 97,38.75 91.75,38.75 89.2,41.3 83.717,41.3 83.717,37.55 86.387,35.75
no net on Bottom Layer "Bottom Layer-No Net 10" (solid, pour order 214): 71.5,40.335
NetIC1_15 on Bottom Layer "Bottom Layer-NetIC1_15" (solid, pour order 184): 19.85,26.406 19.85,26.805 22.462,26.805 22.976,27.319 23.887,27.319 23.969,27.237 23.969,26.147 22.959,26.147 22.7,26.406
NetC6_2 on Bottom Layer "Bottom Layer-NetC6_2" (solid, pour order 178): 24.75,22.325 24.55,22.525 24.55,24.164 22.572,26.142 19.85,26.142 19.85,25.738 21.696,25.738 22.274,25.16 22.802,25.16 23.315,24.646 23.315,20.25 24.75,20.25
no net on Bottom Layer "Bottom Layer-No Net 7" (solid, pour order 176): 25.125,25.363
no net on Bottom Layer "Bottom Layer-No Net 8" (solid, pour order 174): 25.125,25.942
GND on Bottom Layer "Bottom Layer-GND 5" (solid, pour order 162): 24.3,36.5 16.8,36.5 16.8,34.75 24.3,34.75
no net on Bottom Layer "Bottom Layer-No Net 9" (solid, pour order 158): 19.875,31.4
Vcc on Bottom Layer "Bottom Layer-Vcc" (solid, pour order 152): 19.85,27.064 22.014,27.064 22.7,27.75 22.522,27.928 19.875,27.928 19.875,27.922 19.85,27.897
Vcc on Bottom Layer "Bottom Layer-Vcc 2" (solid, pour order 144): 19.85,28.101 22.901,28.101 23.7,28.9 25.589,28.9 25.589,27.621 19.85,27.615
NetC5_2 on Bottom Layer "Bottom Layer-NetC5_2" (solid, pour order 134): 17.032,19.75 22.846,19.75 22.846,18.5 21.946,17.6 16,17.6 16,18.601
NetIC1_20 on Bottom Layer "Bottom Layer-NetIC1_20" (solid, pour order 132): 21.3,23.554 21.3,22.55 21,22.25 20.25,22.25 20.25,20.25 18.5,20.25 18.5,22 19.55,23.05 19.85,23.05 19.85,23.554
NetIC1_18 on Bottom Layer "Bottom Layer-NetIC1_18" (solid, pour order 130): 19.85,24.849 19.85,24.46 21.75,24.46 21.8,24.41 21.8,22.495 21,21.695 21,20.25 22.875,20.25 22.875,24.674 22.7,24.849
Vcc on Bottom Layer "Bottom Layer-Vcc 3" (solid, pour order 112): 10.5,32.7 10.5,30.606 9.219,30.606 9,30.388 9,28.05 9.127,27.923 9.8,27.923 9.8,16.75 7,16.75 7,32.7
NetIC1_12 on Bottom Layer "Bottom Layer-NetIC1_12" (solid, pour order 102): 21.975,30.075 23.05,30.075 23.05,28.75 22.7,28.4 19.85,28.4 19.85,28.725 21.625,28.725 21.975,29.025
GND on Bottom Layer "Bottom Layer-GND 2" (solid, pour order 96): 19.875,29.025 21.3,29.025 21.3,31.4 19.875,31.4
GND on Bottom Layer "Bottom Layer-GND 3" (solid, pour order 78): 16.4,23.862 16.4,33.429 19.1,33.429 19.1,23.862
Vcc on Bottom Layer "Bottom Layer-Vcc 1" (solid, pour order 68): 16.75,44 16.75,38 25.75,38 25.75,44
no net on Bottom Layer "Bottom Layer-No Net 5" (solid, pour order 58): 13,36.5
no net on Bottom Layer "Bottom Layer-No Net 6" (solid, pour order 56): 13.039,35.9
GND on Bottom Layer "Bottom Layer-GND 1" (solid, pour order 54): 24.3,35.4 12.5,35.4 12.5,44 7,44 7,33.2 17.4,33.2 18.842,31.758 24.3,31.758
F\A\U\L\T\ on Bottom Layer "Bottom Layer-F\A\U\L\T\" (solid, pour order 36): 15.742,26.399 13.197,26.399 12.739,26.856 11.977,27.618 11.977,28.278 9.5,28.278 9.5,30.133 11.8,30.133 12.411,29.521 12.411,27.845 13.12,27.135 13.451,26.805 15.742,26.805
NetIC1_5 on Bottom Layer "Bottom Layer-NetIC1_5" (solid, pour order 34): 15.742,25.738 15.742,26.142 13.118,26.147 11.704,27.561 11.704,27.827 10.352,27.827 10.352,25.992 11.647,25.992 11.901,25.738
GND on Bottom Layer "Bottom Layer-GND" (solid, pour order 50): 14.213,29.066 14.213,30.793 14.467,31.047 15.8,31.047 15.8,29.066
no net on Bottom Layer "Bottom Layer-No Net" (solid, pour order 48): 28.956,21.234
no net on Bottom Layer "Bottom Layer-No Net 1" (solid, pour order 42): 28.219,22.809
+V on Bottom Layer "Bottom Layer-+V" (solid, pour order 40): 15.737,27.694 15.737,28.101 13.984,28.101 13.857,28.228 13.857,31.4 15.8,31.4 15.8,32.8 13.451,32.8 13.451,28.162 13.919,27.694 15.658,27.694
NetIC1_7 on Bottom Layer "Bottom Layer-NetIC1_7" (solid, pour order 38): 15.737,27.034 15.737,27.44 13.806,27.44 13.171,28.075 13.171,32.7 11,32.7 11,30.606 11.783,30.606 12.689,29.701 12.689,27.923 13.578,27.034
NetIC1_4 on Bottom Layer "Bottom Layer-NetIC1_4" (solid, pour order 32): 15.748,25.103 15.748,25.216 15.748,25.51 11.768,25.51 10.352,25.51 10.352,23.681 12.054,23.681 13.476,25.103
NetIC1_3 on Bottom Layer "Bottom Layer-NetIC1_3" (solid, pour order 30): 15.746,24.443 15.746,24.849 13.603,24.849 12.587,23.833 11.952,23.198 10.377,23.198 10.377,21.37 12.638,21.37 12.968,21.7 12.968,23.554 13.857,24.443
NetIC1_2 on Bottom Layer "Bottom Layer-NetIC1_2" (solid, pour order 28): 15.746,24.189 13.908,24.189 13.222,23.503 13.222,21.471 12.638,20.887 10.352,20.887 10.352,19.058 13.298,19.058 13.781,19.541 13.781,23.579 14.01,23.808 15.746,23.808
no net on Bottom Layer "Bottom Layer-No Net 2" (solid, pour order 26): 23.525,20.761
no net on Bottom Layer "Bottom Layer-No Net 3" (solid, pour order 24): 23.576,20.584
NetIC1_1 on Bottom Layer "Bottom Layer-NetIC1_1" (solid, pour order 8): 15.746,23.554 14.213,23.554 14.213,19.465 13.349,18.601 11.508,18.601 11.508,16.747 13.468,16.747 15.773,19.052
no net on Bottom Layer "Bottom Layer-No Net 4" (solid, pour order 6): 28.981,22.593
NetC5_2 on Top Layer (solid, pour order 268): 17.5,20.25 17.5,20.5 24.25,20.5 24.25,12.5 24.5,12.25 17.5,12.25
GND on Top Layer (solid, pour order 262): 15.8,35.6 17.6,37.4 24.6,37.4 27.8,34.2 27.35,33.75 15.85,33.75 15.8,33.8
Vcc on Top Layer (solid, pour order 260): 35.5,39.4 35.5,35.8 27.7,35.8 24.7,38.8 24,38.8 24,39.937
NetD4_1 on Top Layer "Top Layer-NetD4_1" (solid, pour order 210): 82.5,10 82.5,20.25 86,20.25 87.5,18.75 97,18.75 97,15 91.6,15 86.6,10
NetQ2_3 on Top Layer "Top Layer-NetQ2_3" (solid, pour order 208): 68.25,19.548 68.25,17.25 68.75,16.75 71.75,13.75 71.75,12.75 75.75,12.75 76.25,13.25 76.25,19.548
Vcap on Top Layer "Top Layer-Vcap" (solid, pour order 194): 65.15,44 83.3,44 83.3,33.5 67.6,33.5 61.744,39.356
NetC5_2 on Top Layer "Top Layer-NetC5_2 3" (solid, pour order 232): 16.2,17.5 16.2,19.565 14.25,19.565 14.25,18.879 15.629,17.5
GND on Top Layer "Top Layer-GND 6" (solid, pour order 228): 55.25,18.143 55.25,35 41.75,35 41.75,31.25 53.839,19.161
Vcap on Top Layer "Top Layer-Vcap 2" (solid, pour order 212): 77,30.25 80.25,30.25 83.3,33.5 83.086,33.714 83.086,34.75 77.75,34.75 76.5,33.5
no net on Top Layer "Top Layer-No Net 4" (solid, pour order 204): 71.75,12.851
NetD2_1 on Top Layer "Top Layer-NetD2_1" (solid, pour order 202): 97,39.067 91.633,39.067 86.7,44 83.375,44 83.375,35.125 97,35.125
GND on Top Layer "Top Layer-GND" (solid, pour order 164): 21.821,35 41.75,35 55.25,21.5 62,21.5 62,27.75 72.5,27.75 80.75,27.75 83.75,30.75 97,30.75 97,19.5 88.44,19.5 86.94,21 67.5,21 67,20.5 67,17 65.75,15.75 65.75,13.75 40.25,13.75 40.25,21.99 32.99,29.25 26.5,29.25 24,31.75 19.75,31.75 18.691,32.809
GND on Top Layer "Top Layer-GND 1" (solid, pour order 150): 19.767,30.2 21.195,30.2 21.195,31.3 20,31.3 16.8,31.3 15.5,30 14.4,30 14.4,31 15.1,31 16.823,32.723
GND on Top Layer "Top Layer-GND 2" (solid, pour order 148): 20,29.75 20,33.75 16.823,33.75 16.823,29.75
NetC5_1 on Top Layer "Top Layer-NetC5_1" (solid, pour order 126): 14.25,23.75 16.25,23.75 16.25,20.75 14.25,20.75
NetIC1_12 on Top Layer "Top Layer-NetIC1_12" (solid, pour order 116): 17.42,21.855 20.75,21.855 20.75,28.645 17.42,28.645
GND on Top Layer "Top Layer-GND 3" (solid, pour order 66): 12.65,35.6 12.5,35.75 12.5,44 7,44 7,33 22.5,33 22.5,35 21.9,35.6
GND on Top Layer "Top Layer-GND 4" (solid, pour order 188): 62.9,27.15 62.9,21.7 59.2,18 59.2,29.2 61.1,29.2 61.1,27.15
NetD1_2 on Top Layer "Top Layer-NetD1_2" (solid, pour order 172): 39.75,35.875 39.75,44 54.25,44 54.25,35.875
Vcap on Top Layer "Top Layer-Vcap 1" (solid, pour order 168): 80.25,30.25 80.25,33.75 70.5,33.75 67.75,36.5 66.5,36.5 66,37 66,44 56.25,44 56.25,33 61.487,33 62,32.487 62,28.5 69.5,28.5 71.25,30.25
GND on Top Layer "Top Layer-GND 5" (solid, pour order 166): 80,29 79.75,28.75 72.75,28.75 71.5,27.5 71.5,27.25 82.5,27.25 84.25,29
NetIC1_15 on Top Layer "Top Layer-NetIC1_15" (solid, pour order 154): 23.75,27.5 22.5,27.5 22.5,23 23.75,23
NetIC1_12 on Top Layer "Top Layer-NetIC1_12 1" (solid, pour order 140): 23.116,30 23.116,29 22.75,29 21.23,27.48 20.6,27.48 20.6,28.645 20.895,28.645 22.25,30
NetC5_2 on Top Layer "Top Layer-NetC5_2" (solid, pour order 138): 18,17.5 16,17.5 16,19 18,19
no net on Top Layer "Top Layer-No Net 3" (solid, pour order 136): 17.75,17.5
NetC5_2 on Top Layer "Top Layer-NetC5_2 1" (solid, pour order 128): 14.25,20.25 18.625,20.25 18.625,18.879 14.25,18.879
NetIC1_12 on Top Layer "Top Layer-NetIC1_12 2" (solid, pour order 124): 18.25,24.25 18.25,25.75 14.25,25.75 14.25,24.25
NetC5_2 on Top Layer "Top Layer-NetC5_2 2" (solid, pour order 114): 35.25,10 35.25,17 26.8,17 23.3,20.5 17.5,20.5 17.5,10
no net on Top Layer "Top Layer-No Net" (solid, pour order 90): 16.75,31
no net on Top Layer "Top Layer-No Net 1" (solid, pour order 80): 23.2,36.2
no net on Top Layer "Top Layer-No Net 2" (solid, pour order 72): 14.25,28.75
Vcc on Top Layer "Top Layer-Vcc" (solid, pour order 64): 17,38.4 35.5,38.4 35.5,44 17,44